# Altium PCB balancing.PcbDoc
Units mm, origin at the board's own origin, x right, y up, seen from the top; angles counter-clockwise.
Board outline 80 x 60 mm, 2 copper layers (Top Layer, Bottom Layer), stack 0.325 mm thick; 74 components, 72 nets, 341 pads, 96 vias.
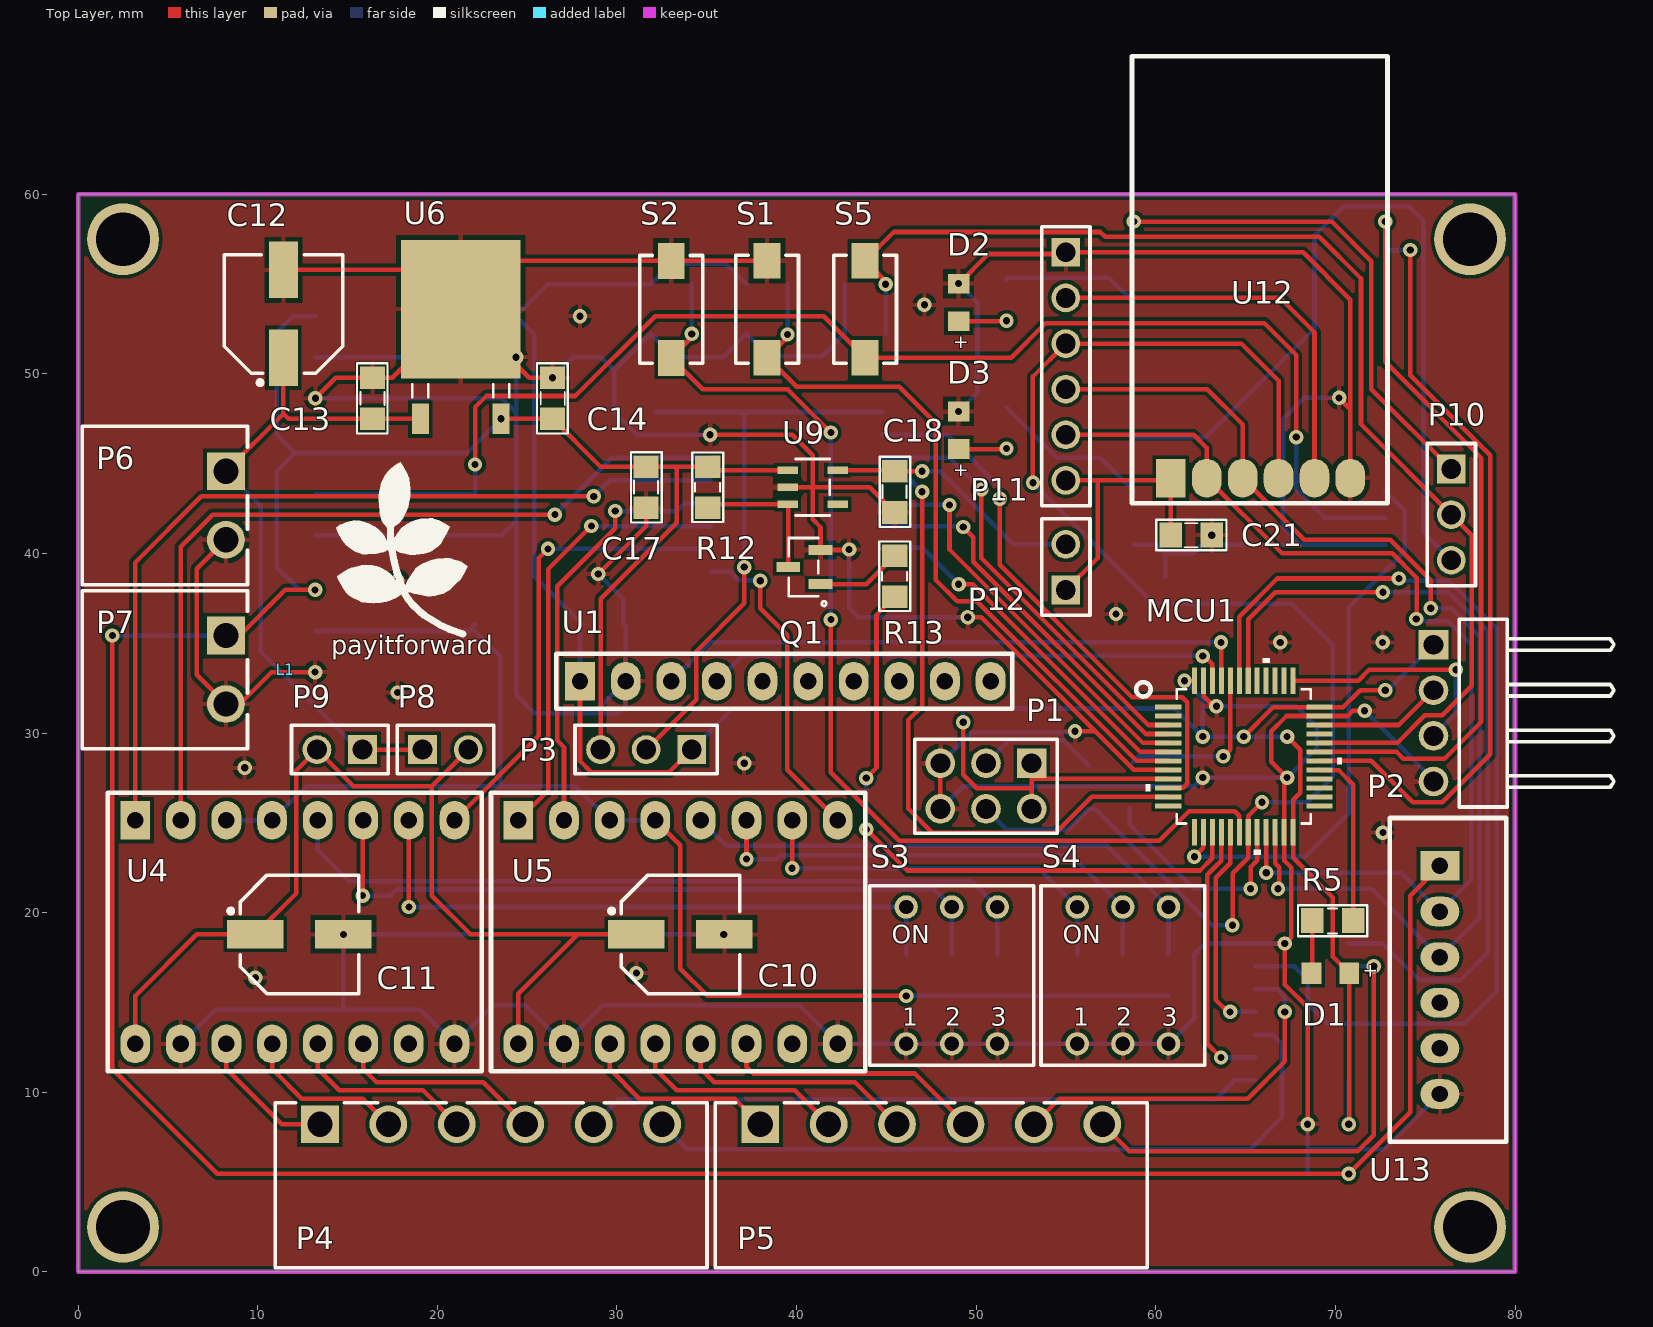
[diagram p0: Top Layer view]
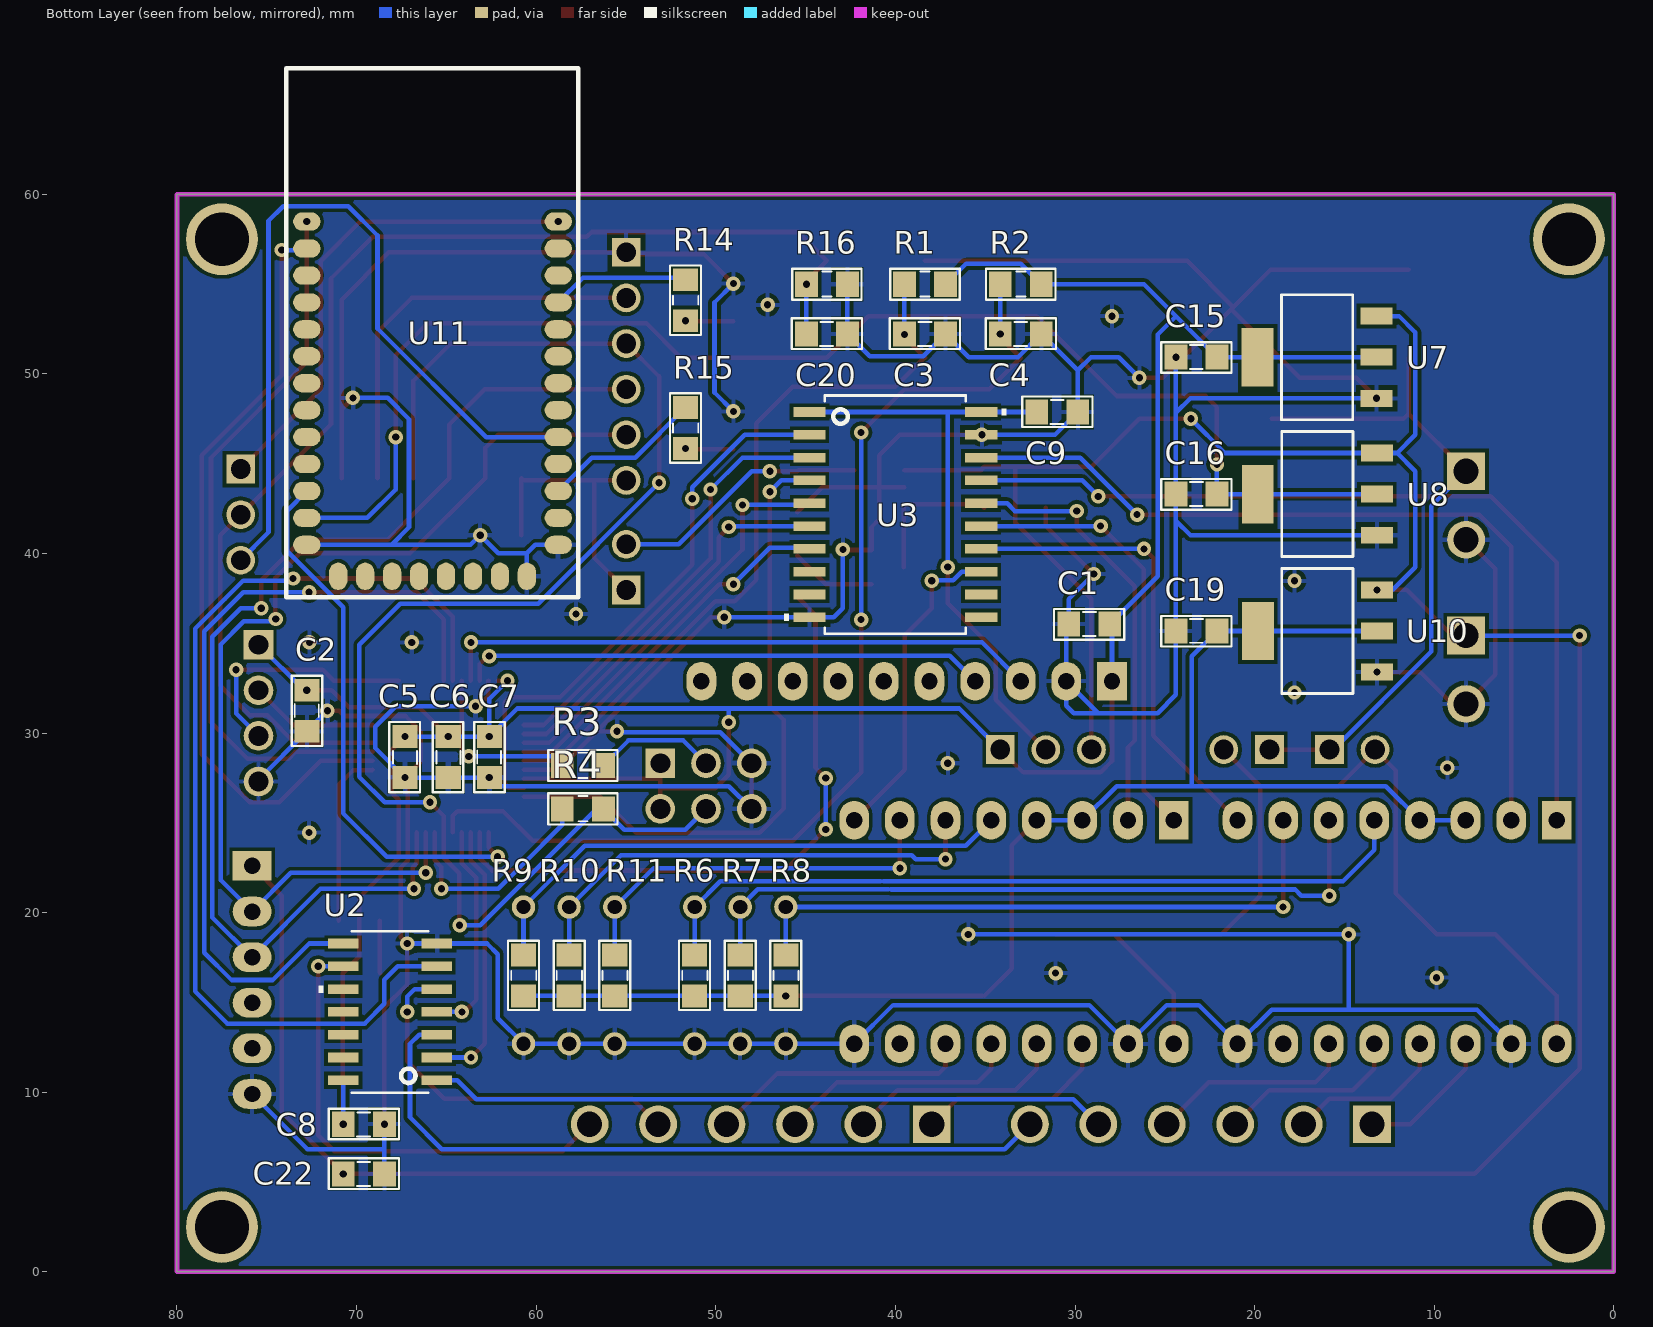
[diagram p1: Bottom Layer view, seen from below]
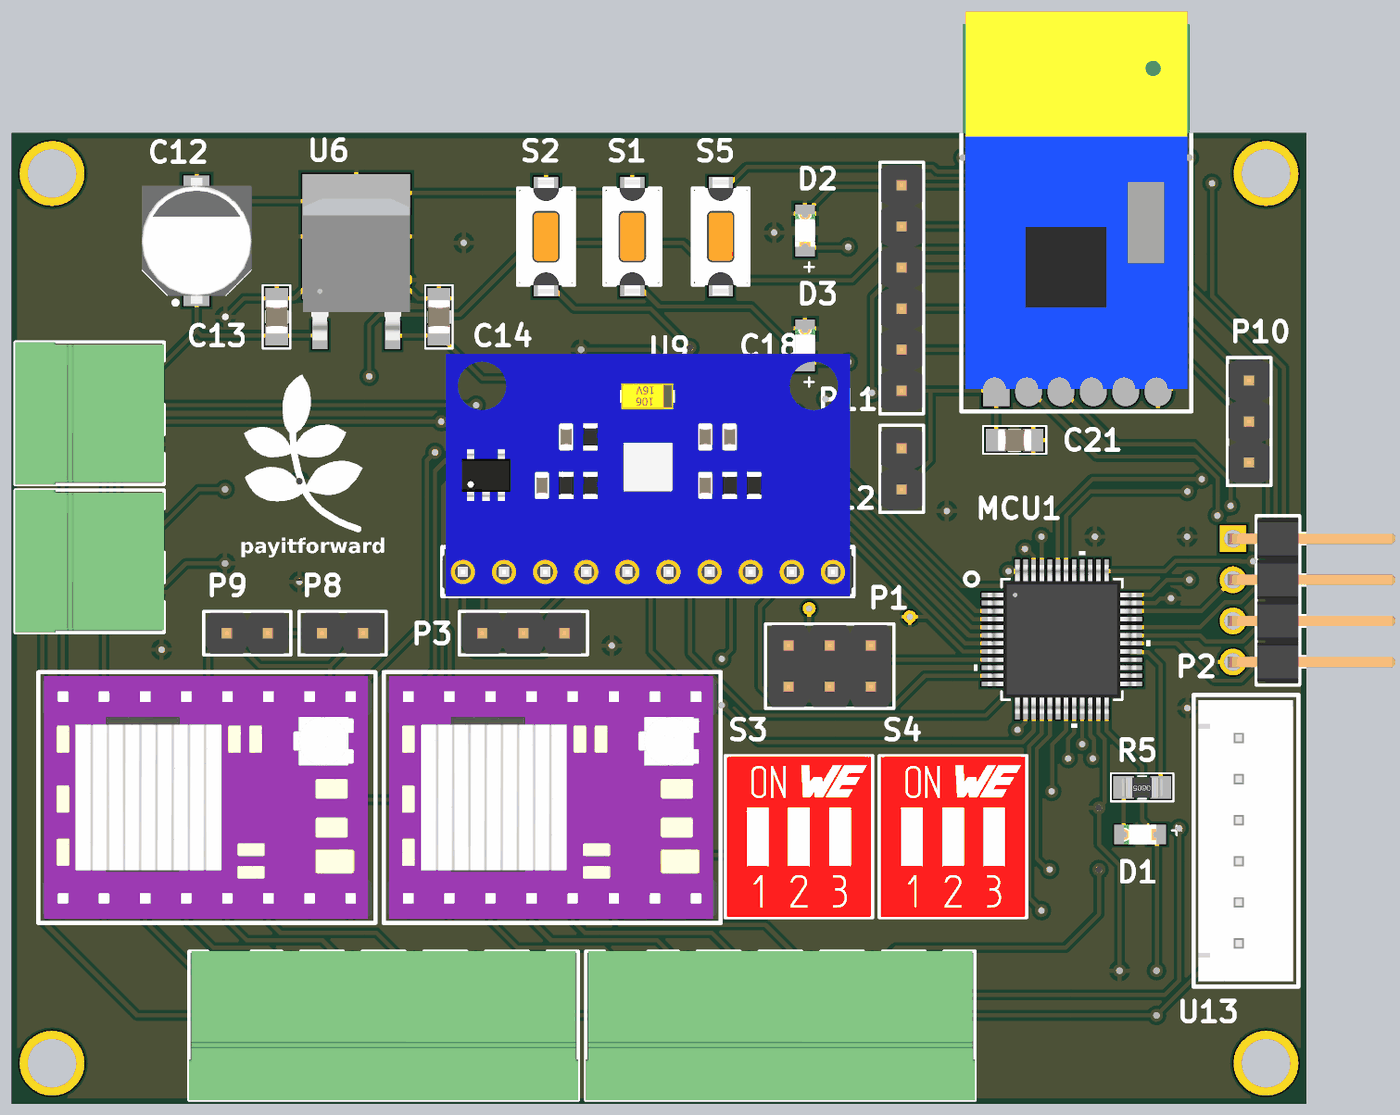
[diagram p2: 3D render of the assembled board from above, using the file's embedded part models]
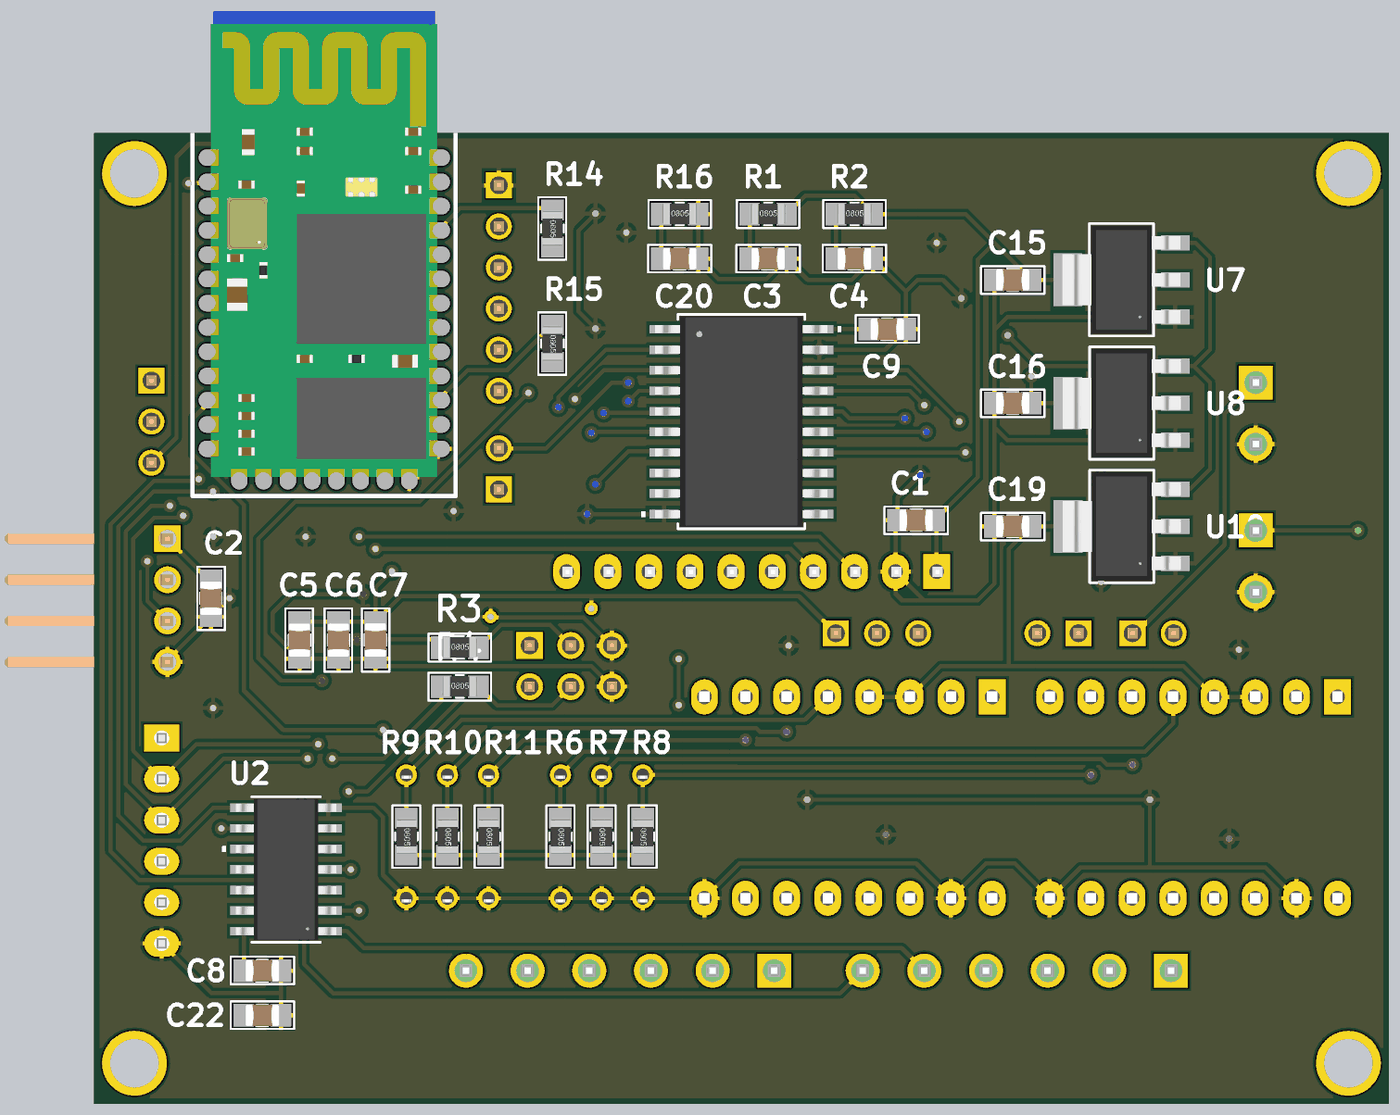
[diagram p3: 3D render of the assembled board from below, using the file's embedded part models]

## Layer stack, top to bottom
Top Solder: solder mask 0.0102, Solder Resist, Dk 3.5
Top Layer: signal copper 0.0356
Dielectric 1: dielectric 0.254, FR-4, Dk 4.2
Bottom Layer: signal copper 0.0356
Bottom Solder: solder mask 0.0102, Solder Resist, Dk 3.5

## Board outline
0,0 0,60 80,60 80,0

## Design rules (kind name [scope] priority, off if disabled: settings)
Clearance [All] p1: gap=0.203 ignorepadtopadclearanceinfootprint=FALSE
Height [All] p1: minheight=0 maxheight=127 prefheight=12.7
PlaneConnect [All] p1: planeconnectstyle=Direct reliefexpansion=0.508 reliefentries=4 reliefconductorwidth=0.254 reliefairgap=0.254
PolygonConnect [All] p1: connectstyle=Relief reliefconductorwidth=0.254 reliefentries=4 polygonreliefangle="90 Angle" airgapwidth=0.254
RoutingVias [All] p1: holewidth=0.4 width=0.8 viastyle="Through Hole" minholewidth=0.4 minwidth=0.8 maxholewidth=0.4 maxwidth=0.8
SolderMaskExpansion [All] p1: expansion=0.102
Width [All] p1: maxlimit=0.381 minlimit=0.152 preferedwidth=0.254
28 further rules are at their usual default settings.

## Classes and differential pairs
component class power_supply: C12 C13 C14 C15 C16 C17 C18 C19 P6 P7 P8 P9 Q1 R12 R13 U6 U7 U8 U9 U10
component class motor_controller: C8 C9 C10 C11 P4 P5 P? R6 R7 R8 R9 R10 R11 S3 S4 U2 U3 U4 U5 U?
component class mcu: C1 C2 C3 C4 C5 C6 C7 D1 L1 MCU1 P1 P2 R1 R2 R3 R4 R5 S1 S2 U1
component class communication: C20 C21 C22 C? D2 D3 P10 P11 P12 R14 R15 R16 S5 U11 U12 U?

## Components (designator, comment, footprint, x,y, rotation, side; value= is the part's Value field where it differs from the comment)
C1 "Cap-100nF-50V-0805" CAP-SM-0805 30.353,36.068 r180 bottom value=100nF/50V
C2 "Cap-100nF-50V-0805" CAP-SM-0805 72.771,30.099 r90 bottom value=100nF/50V
C3 "Cap-100nF-50V-0805" CAP-SM-0805 37.211,52.228 r0 bottom value=100nF/50V
C4 "Cap-100nF-50V-0805" CAP-SM-0805 31.877,52.228 r0 bottom value=100nF/50V
C5 "Cap-100nF-50V-0805" CAP-SM-0805 67.31,29.807 r270 bottom value=100nF/50V
C6 "Cap-100nF-50V-0805" CAP-SM-0805 64.897,29.807 r270 bottom value=100nF/50V
C7 "Cap-100nF-50V-0805" CAP-SM-0805 62.611,27.521 r90 bottom value=100nF/50V
C8 "Cap-100nF-50V-0805" CAP-SM-0805 68.453,8.225 r0 bottom value=100nF/50V
C9 "Cap-100nF-50V-0805" CAP-SM-0805 29.845,47.879 r0 bottom value=100nF/50V
C10 "Cap-Al-100uF-16V-D6L5" CAP-SM-AL-SIZE-D-D6L6 33.528,18.796 r0 top value=100uF/16V
C11 "Cap-Al-100uF-16V-D6L5" CAP-SM-AL-SIZE-D-D6L6 12.319,18.796 r0 top value=100uF/16V
C12 "Cap-Al-100uF-16V-D6L5" CAP-SM-AL-SIZE-D-D6L6 11.43,53.34 r90 top value=100uF/16V
C13 "Cap-10uF-50V-0805" CAP-SM-0805 16.383,49.784 r270 top value=10uF/50V
C14 "Cap-10uF-50V-0805" CAP-SM-0805 26.416,49.784 r270 top value=10uF/50V
C15 "Cap-10uF-50V-0805" CAP-SM-0805 24.384,50.931 r180 bottom value=10uF/50V
C16 "Cap-10uF-50V-0805" CAP-SM-0805 24.384,43.307 r180 bottom value=10uF/50V
C17 "Cap-100nF-50V-0805" CAP-SM-0805 31.623,42.545 r90 top value=100nF/50V
C18 "Cap-10uF-50V-0805" CAP-SM-0805 45.466,42.291 r90 top value=10uF/50V
C19 "Cap-10uF-50V-0805" CAP-SM-0805 24.384,35.687 r180 bottom value=10uF/50V
C20 "Cap-100nF-50V-0805" CAP-SM-0805 42.672,52.228 r0 bottom value=100nF/50V
C21 "Cap-100nF-50V-0805" CAP-SM-0805 63.119,41.021 r180 top value=100nF/50V
C22 "Cap-100nF-50V-0805" CAP-SM-0805 68.453,5.461 r0 bottom value=100nF/50V
D1 "Red, 2V" WL-SMCW_0805 69.723,16.637 r0 top
D2 "Amber, 2V" WL-SMCW_0805 49.022,53.975 r270 top
D3 "Yellow, 2V" WL-SMCW_0805 49.022,46.863 r270 top
L1 "LogoPIF" "PIF LOGO TOP OVERLAY" 11.557,33.528 r0 top
MCU1 "STM32F103C8T6" STM32F103C8T6 64.897,28.702 r0 top
P1 "61300621121" 61300621121 50.546,27.051 r180 top
P2 "61300411021" 61300411021 78.232,31.115 r90 top
P3 "61300311121" 61300311121 31.623,29.083 r180 top
P4 "691322310006" 691322310006 22.987,4.825 r0 top
P5 "691322310006" 691322310006 47.498,4.825 r0 top
P6 "691322310002" 691322310002 4.826,42.672 r270 top
P7 "691322310002" 691322310002 4.826,33.528 r270 top
P8 "61300211121" 61300211121 20.447,29.083 r0 top
P9 "61300211121" 61300211121 14.566,29.083 r180 top
P10 "61300311121" 61300311121 76.454,42.164 r270 top
P11 "61300611121" 61300611121 54.991,50.419 r270 top
P12 "61300211121" 61300211121 54.991,39.243 r90 top
Q1 "MMBT3904-1AM" SOT23_NEX 40.386,39.243 r90 top
R1 "Res-10k-0805" RES-SM-0805 39.497,54.991 r180 bottom value=10K
R2 "Res-10k-0805" RES-SM-0805 34.163,54.991 r180 bottom value=10K
R3 "Res-100K-0805" RES-SM-0805 58.547,28.194 r180 bottom value=100K
R4 "Res-100K-0805" RES-SM-0805 58.547,25.781 r180 bottom value=100K
R5 "Res-1K-0805" RES-SM-0805 70.993,19.558 r180 top value=1K
R6 "Res-1K-0805" RES-SM-0805 51.181,17.653 r270 bottom value=1K
R7 "Res-1K-0805" RES-SM-0805 48.641,17.653 r270 bottom value=1K
R8 "Res-1K-0805" RES-SM-0805 46.101,17.653 r270 bottom value=1K
R9 "Res-1K-0805" RES-SM-0805 60.706,17.653 r270 bottom value=1K
R10 "Res-1K-0805" RES-SM-0805 58.166,17.653 r270 bottom value=1K
R11 "Res-1K-0805" RES-SM-0805 55.626,17.653 r270 bottom value=1K
R12 "Res-4.7K-0805" RES-SM-0805 35.052,42.545 r90 top value=4.7K
R13 "Res-100K-0805" RES-SM-0805 45.466,37.592 r90 top value=100K
R14 "Res-470-0805" RES-SM-0805 51.689,55.245 r270 bottom value=470
R15 "Res-470-0805" RES-SM-0805 51.689,48.133 r270 bottom value=470
R16 "Res-10k-0805" RES-SM-0805 44.958,54.991 r180 bottom value=10K
S1 "434113043826" 434113043826 38.354,53.601 r90 top
S2 "434113043826" 434113043826 33.02,53.594 r90 top
S3 "418117170903" 418117170903 48.641,16.51 r0 top
S4 "418117170903" 418117170903 58.166,16.51 r0 top
S5 "434113043826" 434113043826 43.815,53.601 r90 top
U1 "GY9250" GY9250 27.94,32.893 r270 top
U2 "74HC14D,652" 74HC14D,652 68.135,14.478 r0 bottom
U3 "74HC245D,652" 74HC245D,652 40.005,42.164 r180 bottom
U4 "DRV8825" DRV8825 3.175,25.146 r270 top
U5 "DRV8825" DRV8825 24.511,25.146 r270 top
U6 "L7805" L7805 21.3,53.607 r0 top
U7 "AMS1117" AMS1117 16.523,50.931 r90 bottom
U8 "AMS1117" AMS1117 16.51,43.307 r90 bottom
U9 "XC6204B181MR" XC6204B181MR 40.894,43.688 r0 top
U10 "AMS1117" AMS1117 16.505,35.687 r90 bottom
U11 "HC0506-SMD" HC0506-SMD 72.771,40.482 r180 bottom
U12 "LC12S" LC12S 60.834,44.196 r270 top
U13 "Holybro" HOLYBRO 75.819,22.606 r180 top

## Footprints (in the part's own frame and the unit in brackets; to place one, negate y for a bottom-side part, rotate by r counter-clockwise, add the part's x,y. Pads: shape width x height; smd on the part's side, far side on the other; paste and mask are expansions set on the pad)
74HC14D,652 [mil]
  rect 67x21 smd paste+0 mask+0: 1(-102.5,150) 2(-102.5,100) 3(-102.5,50) 4(-102.5,0) 5(-102.5,-50) 6(-102.5,-100) 7(-102.5,-150) 8(102.5,-150) 9(102.5,-100) 10(102.5,-50) 11(102.5,0) 12(102.5,50) 13(102.5,100) 14(102.5,150)
  silkscreen extent -84,-177 156,177, body extent -122,-172 122,172, height 69
74HC245D,652 [mil]
  rect 71x21 smd paste+0 mask+0: 1(-188,225) 2(-188,175) 3(-188,125) 4(-188,75) 5(-188,25) 6(-188,-25) 7(-188,-75) 8(-188,-125) 9(-188,-175) 10(-188,-225) 11(188,-225) 12(188,-175) 13(188,-125) 14(188,-75) 15(188,-25) 16(188,25) 17(188,75) 18(188,125) 19(188,175) 20(188,225)
  silkscreen extent -244,-261 244,261, body extent -209,-256 209,256, height 104
61300211121 [mm] "Pin Header, pitch 2.54 mm, THT, Vertical, single row, 2p"
  rect 1.6x1.6 hole 1.1: 1(-1.27,0)
  round 1.6 hole 1.1: 2(1.27,0)
  silkscreen extent -2.69,-1.34 2.69,1.34, body extent -2.54,-1.27 2.54,1.27, height 8.57
61300311121 [mm] "Pin Header, pitch 2.54 mm, THT, Vertical, single row, 3p"
  rect 1.6x1.6 hole 1.1: 1(-2.54,0)
  round 1.6 hole 1.1: 2(0,0) 3(2.54,0)
  silkscreen extent -3.96,-1.34 3.96,1.34, body extent -3.81,-1.27 3.81,1.27, height 8.57
61300411021 [mm] "Pin Header, pitch 2.54 mm, THT, Angled, single row, 4p"
  rect 1.65x1.65 hole 1.1: 1(3.81,2.77)
  round 1.65 hole 1.1: 2(1.27,2.77) 3(-1.27,2.77) 4(-3.81,2.77)
  silkscreen extent -5.23,-7.27 5.23,1.34, body extent -5.08,-7.27 5.08,3.09, height 2.58
61300611121 [mm] "Pin Header, pitch 2.54 mm, THT, Vertical, single row, 6p"
  rect 1.6x1.6 hole 1.1: 1(-6.35,0)
  round 1.6 hole 1.1: 2(-3.81,0) 3(-1.27,0) 4(1.27,0) 5(3.81,0) 6(6.35,0)
  silkscreen extent -7.77,-1.34 7.77,1.34, body extent -7.62,-1.27 7.62,1.27, height 8.57
61300621121 [mm] "Pin Header, pitch 2.54 mm, THT, Vertical, dual row, 6p"
  rect 1.65x1.65 hole 1.1: 1(-2.54,-1.27)
  round 1.65 hole 1.1: 2(-2.54,1.27) 3(0,-1.27) 4(0,1.27) 5(2.54,-1.27) 6(2.54,1.27)
  silkscreen extent -3.96,-2.61 3.96,2.61, body extent -3.81,-2.54 3.81,2.54, height 8.59
418117170903 [mm] "2.54 mm compact THT with flat actuator, 3p"
  round 1.3 hole 0.8: 1(-2.54,-3.81) 2(0,-3.81) 3(2.54,-3.81) 4(2.54,3.81) 5(0,3.81) 6(-2.54,3.81)
  silkscreen extent -4.56,-5 4.56,5, body extent -4.46,-4.95 4.46,4.95, height 5.75
434113043826 [mm] "SMD Tact Switch, body 6x3.5mm"
  rect 2x1.5 smd: 1(-2.7,0) 2(2.7,0)
  silkscreen extent -3,-1.75 3,1.75, body extent -3.65,-1.75 3.65,1.75, height 4.3
691322310002 [mm] "Horizontal PCB Header, pitch 3.81mm, 02p"
  rect 2.1x2.1 hole 1.4: 1(-1.905,3.4)
  round 2.1 hole 1.4: 2(1.905,3.4)
  silkscreen extent -4.4,-4.6 4.41,4.6, body extent -4.4,-4.6 4.41,4.6, height 7.25
691322310006 [mm] "Horizontal PCB Header, pitch 3.81mm, 06p"
  rect 2.1x2.1 hole 1.4: 1(-9.525,3.4)
  round 2.1 hole 1.4: 2(-5.715,3.4) 3(-1.905,3.4) 4(1.905,3.4) 5(5.715,3.4) 6(9.525,3.4)
  silkscreen extent -12.02,-4.6 12.03,4.6, body extent -12.02,-4.6 12.02,4.6, height 7.25
AMS1117 [mil]
  rect 37x70 smd paste+0 mask+0: 1(-90.16,-130.5) 2(0,-130.5) 3(90.16,-130.5)
  rect 128x70 smd paste+0 mask+0: 4(0,130.5)
  silkscreen extent -137,-78 137,78, body extent -132,-144 132,144, height 71
CAP-SM-0805 [mil]
  rect 50x55 smd: 1(0,0) 2(90,0)
  silkscreen extent -32,-34 122,33, body extent 4,-27 86,27, height 30
CAP-SM-AL-SIZE-D-D6L6 [mm] "WH6.6"
  rect 3.15x1.6 smd: 1(-2.45,0) 2(2.45,0)
  silkscreen extent -3.95,-3.3 3.3,3.3, body extent -3.9,-3.4 3.9,3.4, height 5.7
DRV8825 [mil]
  rect 85x65 hole 36: 1(0,0)
  oval 85x65 hole 36: 2(0,100) 3(0,200) 4(0,300) 5(0,400) 6(0,500) 7(0,600) 8(0,700) 9(490,0) 10(490,100) 11(490,200) 12(490,300) 13(490,400) 14(490,500) 15(490,600) 16(490,700)
  silkscreen extent -60,-60 550,760, body extent -51,-50 540,750, height 494
GY9250 [mil]
  rect 85x65 hole 36: 1(0,0)
  oval 85x65 hole 36: 2(0,100) 3(0,200) 4(0,300) 5(0,400) 6(0,500) 7(0,600) 8(0,700) 9(0,800) 10(0,900)
  silkscreen extent -60,-52 60,948, body extent -531,-52 60,948, height 367
HC0506-SMD [mil]
  oval 60x40 smd: 1(0,708.66) 2(0,649.61) 3(0,590.55) 4(0,531.5) 5(0,472.44) 6(0,413.39) 7(0,354.33) 8(0,295.28) 9(0,236.22) 10(0,177.16) 11(0,118.11) 12(0,59.05) 13(0,0) 22(551.18,0) 23(551.18,59.05) 24(551.18,118.11) 25(551.18,177.16) 26(551.18,236.22) 27(551.18,295.28) 28(551.18,354.33) 29(551.18,413.39) 30(551.18,472.44) 31(551.18,531.5) 32(551.18,590.55) 33(551.18,649.61) 34(551.18,708.66)
  oval 40x60 smd: 14(68.9,-68.9) 15(127.95,-68.9) 16(187.01,-68.9) 17(246.06,-68.9) 18(305.12,-68.9) 19(364.17,-68.9) 20(423.23,-68.9) 21(482.28,-68.9)
  silkscreen extent -45,-115 595,1045, body extent -1,-69 551,1034, height 93
HOLYBRO [mil]
  rect 85x65 hole 36: 1(0,0)
  oval 85x65 hole 36: 2(0,100) 3(0,200) 4(0,300) 5(0,400) 6(0,500)
  silkscreen extent -145,-105 110,605, body extent -132,-92 98,592, height 284
L7805 [mil]
  rect 37x67 smd: 1(-88.58,-240.5) 2(88.58,-240.5)
  rect 262x304 smd: 3(0,0)
  silkscreen extent -106,-193 106,-165, body extent -130,-253 130,93, height 95
LC12S [mil]
  rect 85x65 smd: 1(0,0)
  oval 85x65 smd: 2(0,78.74) 3(0,157.48) 4(0,236.22) 5(0,314.96) 6(0,393.7)
  Top Layer pour cut-out: 30,350
  silkscreen extent -925,-85 55,480, body extent -917,-75 0,464, height 79
"PIF LOGO TOP OVERLAY" [mm]
  silkscreen extent 2.8,2 10.14,11.54
RES-SM-0805 [mil]
  rect 50x55 smd: 1(0,0) 2(90,0)
  silkscreen extent -31,-34 121,34, body extent -5,-24 95,25, height 20
SOT23_NEX [mil]
  rect 22x52 smd paste+0 mask+4: 1(-37.5,-37.21) 2(37.5,-37.21) 3(0,33.36)
  silkscreen extent -85,-50 64,33, body extent -59,-54 59,44, height 43
STM32F103C8T6 [mil]
  rect 58x11 smd: 1(-166,108.27) 2(-166,88.58) 3(-166,68.9) 4(-166,49.21) 5(-166,29.53) 6(-166,9.84) 7(-166,-9.84) 8(-166,-29.53) 9(-166,-49.21) 10(-166,-68.9) 11(-166,-88.58) 12(-166,-108.27) 25(166,-108.27) 26(166,-88.58) 27(166,-68.9) 28(166,-49.21) 29(166,-29.53) 30(166,-9.84) 31(166,9.84) 32(166,29.53) 33(166,49.21) 34(166,68.9) 35(166,88.58) 36(166,108.27)
  rect 11x58 smd: 13(-108.27,-166) 14(-88.58,-166) 15(-68.9,-166) 16(-49.21,-166) 17(-29.53,-166) 18(-9.84,-166) 19(9.84,-166) 20(29.53,-166) 21(49.21,-166) 22(68.9,-166) 23(88.58,-166) 24(108.27,-166) 37(108.27,166) 38(88.58,166) 39(68.9,166) 40(49.21,166) 41(29.53,166) 42(9.84,166) 43(-9.84,166) 44(-29.53,166) 45(-49.21,166) 46(-68.9,166) 47(-88.58,166) 48(-108.27,166)
  silkscreen extent -236,-215 215,215, body extent -181,-181 181,181, height 63
WL-SMCW_0805 [mm] "SMD Mono-color Chip LED, body 2.0x1.25mm"
  rect 1.1x1.2 smd: 1(-1.05,0) 2(1.05,0)
  body extent -1,-0.63 1,0.62, height 0.7
XC6204B181MR [mil]
  rect 44.5x17 smd paste+0 mask+0: 1(-54.75,37.4) 2(-54.75,0) 3(-54.75,-37.4) 4(54.75,-37.4) 5(54.75,37.4)
  silkscreen extent -38,-62 38,62, body extent -55,-57 55,57, height 51

## Part data
C1 C2 C3 C4 C5 C6 C7 C8 C9 C17 C20 C21 C22: "CAP CER 0.1UF 50V Y5V 0805", Manufacturer="Samsung Electro-Mechanics", Manufacturer Part Number=CL21F104ZBCNNNC, Supplier 1 Part Number=1276-1007-1-ND, Local Supplier=thegioiic, Local Supplier Link=https://thegioiic.com/products/tu-100nf-0-1uf-50v-0805, Supplier 1=Digikey, Supplier 1 Link=https://www.digikey.com/product-detail/en/samsung-electro-mechanics/CL21F104ZBCNNNC/1276-1007-1-ND/3889093
C10 C11 C12: "CAP ALUM 100UF 20% 16V SMD", Manufacturer=Nichicon, Manufacturer Part Number=UWX1C101MCL1GB, Supplier 1 Part Number=493-2105-1-ND, Local Supplier=thegioiic, Local Supplier Link=https://thegioiic.com/products/tu-nhom-smd-100uf-16v-d6-3l5-4, Supplier 1=Digikey, Supplier 1 Link=https://www.digikey.com/product-detail/en/nichicon/UWX1C101MCL1GB/493-2105-1-ND/590080
C13 C14 C15 C16 C18 C19: "CAP CER 10UF 50V X5R 0805", Manufacturer=Yageo, Manufacturer Part Number=CC0805KKX5R9BB106, Supplier 1 Part Number=311-3499-2-ND, Local Supplier=thegioiic, Local Supplier Link=https://thegioiic.com/products/tu-10uf-50v-0805, Supplier 1=Digikey, Supplier 1 Link=https://www.digikey.com/product-detail/en/yageo/CC0805KKX5R9BB106/311-3499-2-ND/7164383
D1: library part 150080RS75000, "WL-SMCW SMT Mono-color Chip LED Waterclear, size 0805, Red, 2V, 140deg", Emitting Color=Red, Forward Voltage typ.=2V, Operating Temperature="-40 to +85degC", Chip Technology=AlInGaP, ComponentLink1Description=Manufacturer, ComponentLink1URL=http://www.we-online.de, ComponentLink2Description=Datasheet, ComponentLink2URL=https://www.we-online.com/catalog/datasheet/150080RS75000.pdf, Dominant Wavelength typ.=625nm, Luminous Intensity typ.=150mcd, Mounting Technology=SMT, Packaging="Tape and Reel", Part Number=150080RS75000, Peak Wavelength typ.=630nm, Published Date="December 2019", Publisher="Wurth Elektronik", Size=0805, Viewing Angle=140deg
D2: library part 150080AS75000, "WL-SMCW SMT Mono-color Chip LED Waterclear, size 0805, Amber, 2V, 140deg", Emitting Color=Amber, Forward Voltage typ.=2V, Operating Temperature="-40 to +85degC", Chip Technology=AlInGaP, ComponentLink1Description=Manufacturer, ComponentLink1URL=http://www.we-online.de, ComponentLink2Description=Datasheet, ComponentLink2URL=https://www.we-online.com/catalog/datasheet/150080AS75000.pdf, Dominant Wavelength typ.=605nm, Luminous Intensity typ.=130mcd, Mounting Technology=SMT, Packaging="Tape and Reel", Part Number=150080AS75000, Peak Wavelength typ.=610nm, Published Date="December 2019", Publisher="Wurth Elektronik", Size=0805, Viewing Angle=140deg
D3: library part 150080YS75000, "WL-SMCW SMT Mono-color Chip LED Waterclear, size 0805, Yellow, 2V, 140deg", Emitting Color=Yellow, Forward Voltage typ.=2V, Operating Temperature="-40 to +85degC", Chip Technology=AlInGaP, ComponentLink1Description=Manufacturer, ComponentLink1URL=http://www.we-online.de, ComponentLink2Description=Datasheet, ComponentLink2URL=https://www.we-online.com/catalog/datasheet/150080YS75000.pdf, Dominant Wavelength typ.=590nm, Luminous Intensity typ.=120mcd, Mounting Technology=SMT, Packaging="Tape and Reel", Part Number=150080YS75000, Peak Wavelength typ.=595nm, Published Date="December 2019", Publisher="Wurth Elektronik", Size=0805, Viewing Angle=140deg
P1: "WR-PHD Pin Header, THT, pitch 2.54mm, Dual Row, Vertical, 6p", Contact Resistance=20mOhm, Manufacturer="Wurth Elektronik", Operating Temperature="-40 to +105degC", Rated Current=3A, Withstanding Voltage=500VAC, Working Voltage=250VAC, ComponentLink1Description=Manufacturer, ComponentLink1URL=http://www.we-online.de, ComponentLink2Description=Datasheet, ComponentLink2URL=https://www.we-online.com/catalog/datasheet/61300621121.pdf, Gender="Pin Header", Manufacturer Part Number=61300621121, Mounting Technology=THT, Orientation=Vertical, Packaging=Bag, Pin Number=6, Pitch=2.54mm, Published Date="May 2020", Row Number=Dual
P2: "WR-PHD Pin Header, THT, pitch 2.54mm, Single Row, Angled, 4p", Contact Resistance=20mOhm, Manufacturer="Wurth Elektronik", Operating Temperature="-40 to +105degC", Rated Current=3A, Withstanding Voltage=500VAC, Working Voltage=250VAC, ComponentLink1Description=Manufacturer, ComponentLink1URL=http://www.we-online.de, ComponentLink2Description=Datasheet, ComponentLink2URL=https://www.we-online.com/catalog/datasheet/61300411021.pdf, Gender="Pin Header", Manufacturer Part Number=61300411021, Mounting Technology=THT, Orientation=Angled, Packaging=Bag, Pin Number=4, Pitch=2.54mm, Published Date="May 2020", Row Number=Single
P3 P10: "WR-PHD Pin Header, THT, pitch 2.54mm, Single Row, Vertical, 3p", Contact Resistance=20mOhm, Manufacturer="Wurth Elektronik", Operating Temperature="-40 to +105degC", Rated Current=3A, Withstanding Voltage=500VAC, Working Voltage=250VAC, ComponentLink1Description=Manufacturer, ComponentLink1URL=http://www.we-online.de, ComponentLink2Description=Datasheet, ComponentLink2URL=https://www.we-online.com/catalog/datasheet/61300311121.pdf, Gender="Pin Header", Manufacturer Part Number=61300311121, Mounting Technology=THT, Orientation=Vertical, Packaging=Bag, Pin Number=3, Pitch=2.54mm, Published Date="May 2020", Row Number=Single
P4 P5: "WR-TBL Serie 322 Horizontal PCB Header, Pluggable, pitch 3.81mm, 6p", Operating Temperature="-40 to +105degC", Rated Current [UL]=10A, Working Voltage [UL]=300VAC, Application=Pluggable, Compliance=RoHS, ComponentLink1Description=Manufacturer, ComponentLink1URL=http://www.we-online.de, ComponentLink2Description=Datasheet, ComponentLink2URL=https://katalog.we-online.de/em/datasheet/691322310006.pdf, Modularity=No, Mounting Technology=THT, Packaging=Box, Part Number=691322310006, PCB/Cable/Panel=PCB, Pin Number=6, Pitch=3.81mm, Published Date="October 2019", Publisher="Wurth Elektronik", Type=Horizontal
P6 P7: "WR-TBL Serie 322 Horizontal PCB Header, Pluggable, pitch 3.81mm, 2p", Operating Temperature="-40 to +105degC", Rated Current [UL]=10A, Working Voltage [UL]=300VAC, Application=Pluggable, Compliance=RoHS, ComponentLink1Description=Manufacturer, ComponentLink1URL=http://www.we-online.de, ComponentLink2Description=Datasheet, ComponentLink2URL=https://katalog.we-online.de/em/datasheet/691322310002.pdf, Modularity=No, Mounting Technology=THT, Packaging=Box, Part Number=691322310002, PCB/Cable/Panel=PCB, Pin Number=2, Pitch=3.81mm, Published Date="October 2019", Publisher="Wurth Elektronik", Type=Horizontal
P8 P9 P12: "WR-PHD Pin Header, THT, pitch 2.54mm, Single Row, Vertical, 2p", Contact Resistance=20mOhm, Manufacturer="Wurth Elektronik", Operating Temperature="-40 to +105degC", Rated Current=3A, Withstanding Voltage=500VAC, Working Voltage=250VAC, ComponentLink1Description=Manufacturer, ComponentLink1URL=http://www.we-online.de, ComponentLink2Description=Datasheet, ComponentLink2URL=https://www.we-online.com/catalog/datasheet/61300211121.pdf, Gender="Pin Header", Manufacturer Part Number=61300211121, Mounting Technology=THT, Orientation=Vertical, Packaging=Bag, Pin Number=2, Pitch=2.54mm, Published Date="May 2020", Row Number=Single
P11: "WR-PHD Pin Header, THT, pitch 2.54mm, Single Row, Vertical, 6p", Contact Resistance=20mOhm, Manufacturer="Wurth Elektronik", Operating Temperature="-40 to +105degC", Rated Current=3A, Withstanding Voltage=500VAC, Working Voltage=250VAC, ComponentLink1Description=Manufacturer, ComponentLink1URL=http://www.we-online.de, ComponentLink2Description=Datasheet, ComponentLink2URL=https://www.we-online.com/catalog/datasheet/61300611121.pdf, Gender="Pin Header", Manufacturer Part Number=61300611121, Mounting Technology=THT, Orientation=Vertical, Packaging=Bag, Pin Number=6, Pitch=2.54mm, Published Date="May 2020", Row Number=Single
R1 R2 R16: "RES 10K OHM 1% 1/4W 0805", Manufacturer="Stackpole Electronics Inc", Manufacturer Part Number=RNCP0805FTD10K0, Supplier 1 Part Number=RNCP0805FTD10K0CT-ND, Local Supplier=thegioiic, Local Supplier Link=https://thegioiic.com/products/dien-tro-10k-ohm-0805-5, Supplier 1=Digikey, Supplier 1 Link=https://www.digikey.com/product-detail/en/stackpole-electronics-inc/RNCP0805FTD10K0/RNCP0805FTD10K0CT-ND/2240601
R3 R4 R13: "RES 0 OHM JUMPER 0805", Manufacturer="Vishay Dale", Manufacturer Part Number=WSL080500000ZEA9, Supplier 1 Part Number=541-3928-1-ND, Local Supplier=thegioiic, Local Supplier Link=https://thegioiic.com/products/dien-tro-0-ohm-0805-5, Supplier 1=Digikey, Supplier 1 Link=https://www.digikey.com/product-detail/en/vishay-dale/WSL080500000ZEA9/541-3928-1-ND/7423223
R5 R6 R7 R8 R9 R10 R11: "RES 1K OHM 1% 1/4W 0805", Manufacturer="Stackpole Electronics Inc", Manufacturer Part Number=RNCP0805FTD1K00, Supplier 1 Part Number=RNCP0805FTD1K00CT-ND, Local Supplier=thegioiic, Local Supplier Link=https://thegioiic.com/products/dien-tro-1k-ohm-0805-5, Supplier 1=Digikey, Supplier 1 Link=https://www.digikey.com/product-detail/en/stackpole-electronics-inc/RNCP0805FTD1K00/RNCP0805FTD1K00CT-ND/2240568
R12: "RES SMD 4.7K OHM 5% 1/8W 0805", Manufacturer=Yageo, Manufacturer Part Number=RC0805JR-074K7L, Supplier 1 Part Number=311-4.7KARCT-ND, Local Supplier=thegioiic, Local Supplier Link=https://thegioiic.com/products/dien-tro-4-7k-ohm-0805-5, Supplier 1=Digikey, Supplier 1 Link=https://www.digikey.com/product-detail/en/yageo/RC0805JR-074K7L/311-4.7KARCT-ND/731274
R14 R15: "RES 470 OHM JUMPER 0805", Manufacturer=YAG6006CT-ND, Manufacturer Part Number=PE0805FRF7W0R047L, Local Supplier=thegioiic, Local Supplier Link=https://www.thegioiic.com/products/dien-tro-470-kohm-0805-5, Supplier 1=Digikey, Supplier 1 Link=https://www.digikey.com/product-detail/en/yageo/PE0805FRF7W0R047L/YAG6006CT-ND/9696460, Supplier 1 Part Number=YAG6006CT-ND
S1 S2 S5: "WS-TASV J-Bend SMT Tact Switch 6x3.5mm, height 4.3mm, 260gf", Operating Temperature="-40 to +85degC", Rated Current=50mA, Rated Voltage=12VDC, ComponentLink1Description=Manufacturer, ComponentLink1URL=http://www.we-online.de, ComponentLink2Description=Datasheet, ComponentLink2URL=https://katalog.we-online.com/em/datasheet/434113043826.pdf, Contact Material="Stainless Steel", Contact Plating=Silver, Height=4.3mm, Mounting Technology=SMT, Operation Force=260gf, Packaging="Tape and Reel", Part Number=434113043826, Published Date="September 2019", Publisher="Wurth Elektronik", Terminal Material="Copper Alloy", Terminal Plating=Silver, Washable=No
S3 S4: "WS-DITV Compact THT Dip Switch, Flat Actuator, pitch 2.54mm, 3p", Operating Temperature="-40 to +85degC", Rated Current Non-Switching=100mA, Rated Current Switching=25mA, Rated Voltage Non-Switching=50VDC, Rated Voltage Switching=24VDC, Actuator Type="Flat Type", Circuit=SPST-NO, ComponentLink1Description=Manufacturer, ComponentLink1URL=http://www.we-online.de, ComponentLink2Description=Datasheet, ComponentLink2URL=https://katalog.we-online.com/em/datasheet/418117170903.pdf, Contact Material="Copper Alloy", Contact Plating=Gold, Mounting Technology=THT, Operation Force=800g, Packaging=Tube, Part Number=418117170903, Pitch=2.54mm, Pole Number=3, Published Date="September 2019", Publisher="Wurth Elektronik"
U6: Manufacturer_Part_Number=L7805CDT-TR, Built_By=EMA_UL_Team, Copyright="Copyright (C) 2018 Accelerated Designs. All rights reserved", RefDes=RefDes, Type=DEV, Vendor=STMicroelectronics
U11: Local Supplier Part Name=HS000881, Local Supplier=HShop, Local Supplier Link=https://hshop.vn/products/mach-thu-phat-bluetooth-hc-05-chua-ra-chon-master
U12: Local Supplier Part Number=HS000895, Local Supplier=HShop, Local Supplier Link=https://hshop.vn/products/mach-thu-phat-rf-uart-lc12s-2-4ghz
L1: Local Supplier=x, Local Supplier Link=x
MCU1: Built_By=EMA_UL_Team, Copyright="Copyright (C) 2018 Accelerated Designs. All rights reserved", Manufacturer_Part_Number=STM32F103C8T6, RefDes=RefDes, Type=DEV, Vendor=STMicroelectronics
U1: Local Supplier=HShop
U2: Copyright="Copyright (C) 2016 Accelerated Designs. All rights reserved", Manufacturer_Part_Number=74HC14D,652, RefDes=RefDes, SourceLibrary=Nexperia_2018-05-2018, Type=DEV, Vendor=Nexperia
U3: Copyright="Copyright (C) 2016 Accelerated Designs. All rights reserved", Manufacturer_Part_Number=74HC245D,652, RefDes=RefDes, SourceLibrary=Nexperia_2018-05-2018, Type=DEV, Vendor=Nexperia
U7 U8 U10: Built_By=EMA_Matt, Copyright="Copyright (C) 2018 Accelerated Designs. All rights reserved", Manufacturer_Part_Number=AMS1117, RefDes=RefDes, SourceLibrary=AMS_2019-10-31, Type=DEV, Vendor=AMS
U9: Built_By=EMA_UL_Team, Copyright="Copyright (C) 2018 Accelerated Designs. All rights reserved", Manufacturer_Part_Number=XC6204B181MR, RefDes=RefDes, SourceLibrary=Torex_2016-07-05_1, Type=DEV, Vendor="Torex Semiconductor"

## Free pads (board coordinates)
  round 4 hole 3: 2(2.5,2.5) 2(2.5,57.5) 2(77.5,2.5) 2(77.5,57.5)

## Via types
v1: diameter 0.8, hole 0.4, Top Layer to Bottom Layer, tented both sides, 94 vias
v2: diameter 0.8, hole 0.4, Top Layer to Bottom Layer, 2 vias

## Nets (pads, with @x,y where several pads share a name; then routed paths per layer and width w, separated by ;. In a path a pad name is that pad's centre, name@x,y a point inside that pad or via, vN(x,y) a via of type N, cw(c..) or ccw(c..) an arc to the next point about the centre after c; other vN are vias at no path point)
3V3_BLUE: C16.2 S5.1 U8.2 U8.4 U11.12 | length 77.1
  Top Layer w0.254: v1(22.098,44.958) 22.098,48.133 22.733,48.768 27.686,48.768 32.131,53.213 41.503,53.213 S5.1 51.951,50.901 53.882,52.832 66.04,52.832 67.818,51.054 v1(67.818,46.482)
  Bottom Layer w0.254: U8.2 U8.4 C16.2 v1(22.098,44.958) ; v1(67.818,46.482) 67.818,43.561 69.397,41.982 U11.12
3V3_DRV: C19.2 R6.2 R7.2 R8.2 R9.2 R10.2 R11.2 U4.3 U4.4 U5.3 U5.4 U10.2 U10.4 | length 80.3
  Top Layer w0.254: U5.4 33.528,23.749 33.528,16.891 35.052,15.367 ; 35.179,15.367 v1(46.101,15.367)
  Bottom Layer w0.254: U4.3 U4.4 12.7,27.051 23.495,27.051 ; U10.2@13.195,35.687 21.826,35.687 C19.2@22.098,36.068 ; C19.2 23.495,34.29 23.495,27.051 ; U5.4 U5.3 27.686,27.051 23.495,27.051 ; v1(46.101,15.367) R7.2 R6.2 R11.2 R10.2 R9.2
3V3_MCU: C1.2 C2.2 C5.1 C6.1 C7.2 C8.2 C15.2 D1.2 MCU1.9 MCU1.24 MCU1.36 MCU1.48 P1.1 P1.2 P2.1 P3.1 R1.2 R2.2 U1.1 U2.14 U7.2 U7.4 | length 155.3
  Top Layer w0.254: U1.1 27.94,28.448 28.575,27.813 32.893,27.813 P3.1 ; v2(49.276,30.607) 49.276,27.686 50.026,26.936 53.074,26.936 53.086,26.924 ; P1.2 53.086,26.924 ; P1.1 53.086,27.432 ; MCU1.9 53.106,27.452 53.086,27.432 ; v1(61.595,32.918) MCU1.48 ; v1(64.897,29.807) 66.542,31.452 MCU1.36 70.441,31.452 71.374,32.385 v1(72.771,32.385) ; v1(67.31,29.807) 68.047,29.07 68.047,26.689 67.647,26.289 MCU1.24 67.647,23.051 69.85,20.848 69.85,17.56 D1.2 70.773,8.259 v1(70.739,8.225) ; 53.086,26.924 53.086,27.432
  Bottom Layer w0.254: U7.2 U7.4 C15.2 24.38,53.213 ; U1.1 27.94,35.941 C1.2 25.4,38.735 25.4,52.193 24.38,53.213 ; P3.1 36.449,31.369 49.276,31.369 ; R1.2 36.068,56.134 33.02,56.134 R2.2 26.158,54.991 24.38,53.213 ; v2(49.276,30.607) 49.276,31.369 ; v1(61.595,32.918) 62.611,31.902 v1(62.611,29.807) ; v1(67.31,29.807) v1(64.897,29.807) v1(62.611,29.807) ; v1(70.739,8.225) U2.14 ; v1(72.771,32.385) 72.922,32.385 P2.1 ; 49.276,31.369 61.049,31.369 v1(62.611,29.807)
3V3_RF: C18.2 P12.2 U9.5 | length 14.4
  Top Layer w0.254: U9.5 45.405,44.638 C18.2 v1(46.99,44.577)
  Bottom Layer w0.254: v1(46.99,44.577) 48.006,44.577 52.07,40.513 P12.2
5V: C14.2 C17.2 C22.2 P3.3 P7.1 R12.2 U6.2 U7.3 U8.3 U9.1 U10.3 U13.1 | length 193
  Top Layer w0.254: v1(1.905,35.433) 1.905,29.112 1.905,11.303 7.747,5.461 v1(70.739,5.461) 74.168,8.89 74.168,17.763 74.168,20.955 U13.1 ; P7.1 8.988,35.433 11.532,37.977 v1(13.191,37.977) ; v1(23.55,47.498) C14.2 29.083,44.831 C17.2 33.337,44.831 ; P3.3 29.096,29.096 29.096,37.478 33.337,41.719 33.337,44.831 ; U9.1 35.245,44.638 R12.2 33.337,44.831
  Bottom Layer w0.254: v1(1.905,35.433) P7.1 ; v1(13.191,37.977) 12.315,37.977 11.049,39.243 11.049,44.577 12.069,45.597 ; U7.3 11.962,53.221 11.049,52.308 11.049,46.617 12.069,45.597 ; v1(23.55,47.498) 21.649,45.597 U8.3 12.069,45.597
12V: C12.1 C13.2 P6.1 P8.1 P9.1 U6.1 | length 37.5
  Top Layer w0.254: P6.1 11.43,47.781 ; C12.1 11.43,47.781 ; P9.1 P8.1 ; U6.1 C13.2 11.713,47.498 11.43,47.781
  Bottom Layer w0.254: P6.1 10.16,42.643 10.16,34.544 15.621,29.083 P9.1
12V_MTR: C10.1 C11.1 P8.2 P9.2 U4.9 U5.9 | length 58.4
  Top Layer w0.254: U4.9 3.175,15.367 6.604,18.796 C11.1 12.153,21.08 12.153,27.94 P9.2 15.328,27.051 19.685,27.051 ; P8.2 19.685,27.051 ; U5.9 24.511,15.494 27.813,18.796 ; C10.1 27.813,18.796 ; 19.685,27.051 19.685,20.955 21.844,18.796 27.813,18.796
BLU_KEY_HC05: P10.1 U11.34 | length 27.6
  Top Layer w0.254: v1(58.771,58.482) 69.788,58.482 72.005,56.265 72.005,49.153 P10.1
BLU_KEY_HC06: P10.3 U11.26 | length 44.4
  Bottom Layer w0.254: U11.26 62.789,46.482 68.834,52.527 68.834,57.709 70.46,59.334 74.092,59.334 74.905,58.522 74.905,41.173 P10.3
BLUE_KEY: C20.2 MCU1.32 P10.2 R16.1 S5.2 | length 68.9
  Top Layer w0.254: v1(44.958,54.991) 44.958,55.158 S5.2 45.413,57.899 56.909,57.899 57.175,57.633 65.405,57.633 69.102,57.633 71.425,55.31 71.425,47.193 P10.2 77.597,41.021 77.597,32.639 75.958,31 74.983,31 73.435,29.452 MCU1.32
  Bottom Layer w0.254: C20.2 v1(44.958,54.991)
BLUE_RX: MCU1.30 U11.2 | length 42.9
  Top Layer w0.254: MCU1.30 72.005,28.452 74.307,26.15 75.94,26.15 78.613,28.822 78.613,45.478 74.168,49.923 v1(74.168,56.896)
  Bottom Layer w0.254: U11.2 72.857,56.896 v1(74.168,56.896)
BLUE_TX: MCU1.31 U11.1 | length 40.1
  Top Layer w0.254: MCU1.31 73.41,28.952 73.787,28.575 76.073,28.575 78.105,30.607 78.105,45.339 72.771,50.673 v1(72.771,58.482)
BOOT0: P1.3 R3.2 | length 6.8
  Bottom Layer w0.254: P1.3 51.816,29.591 54.864,29.591 R3.2
BOOT1: MCU1.19 P1.4 P11.3 R4.2 U12.4 | length 83.8
  Top Layer w0.254: v1(53.16,43.942) 53.16,49.858 P11.3 64.77,51.689 66.834,49.625 U12.4 ; v1(64.262,19.304) 64.294,19.336 64.294,21.114 64.294,21.287 64.294,22.208 65.147,23.061 MCU1.19 65.147,25.384 v1(65.913,26.15)
  Bottom Layer w0.254: P1.4 51.701,24.626 55.106,24.626 R4.2 56.631,25.781 61.112,21.3 63.108,19.304 v1(64.262,19.304) ; v1(53.16,43.942) 59.891,37.211 67.564,37.211 69.85,34.925 69.85,27.559 68.441,26.15 v1(65.913,26.15)
BTN: C4.2 MCU1.18 R2.1 S2.1 | length 60.1
  Top Layer w0.254: v1(34.163,52.228) 34.163,52.037 S2.1 34.765,49.149 39.497,49.149 v1(41.91,46.736) ; v1(41.91,36.322) 41.91,27.813 45.72,24.003 60.198,24.003 61.849,25.654 64.389,25.654 64.647,25.396 MCU1.18
  Bottom Layer w0.254: v1(34.163,52.228) R2.1 ; v1(41.91,36.322) v1(41.91,46.736)
ENC_1A: P4.5 U2.1 | length 37.8
  Bottom Layer w0.254: P4.5 30.099,9.622 63.343,9.622 64.389,10.668 U2.1
ENC_1B: P4.6 U2.3 | length 41.6
  Bottom Layer w0.254: P4.6 33.909,6.828 65.248,6.828 67.026,8.606 67.026,12.703 66.521,13.208 U2.3
ENC_2A: P5.5 U2.5 | length 20.9
  Top Layer w0.254: P5.5 54.64,9.652 65.115,9.652 67.183,11.72 v1(67.183,14.478)
  Bottom Layer w0.254: U2.5 66.772,15.748 67.183,15.337 v1(67.183,14.478)
ENC_2B: P5.6 U2.9 | length 26.9
  Top Layer w0.254: P5.6 58.517,6.731 71.247,6.731 72.136,7.62 v1(72.136,17.018)
  Bottom Layer w0.254: U2.9 v1(72.136,17.018)
GND: C1.1 C2.1 C3.1 C4.1 C5.2 C6.2 C7.1 C8.1 C9.1 C10.2 C11.2 C12.2 C13.1 C14.1 C15.1 C16.1 C17.1 C18.1 C19.1 C20.1 C21.1 C22.1 D2.1 D3.1 MCU1.8 MCU1.23 MCU1.35 MCU1.47 P1.5 P1.6 P2.4 P6.2 P7.2 P11.1 Q1.2 R16.2 S1.2 S2.2 S3.1 S3.2 S3.3 S4.1 S4.2 S4.3 U1.2 U2.7 U3.10 U3.19 U4.10 U4.16 U5.10 U5.16 U6.3 U7.1 U8.1 U9.2 U10.1 U11.13 U11.21 U11.22 U12.6 U13.6 | length 456.4
  Top Layer w0.254: P6.2 6.604,39.145 6.604,33.245 P7.2 8.988,31.623 10.762,33.397 v1(13.191,33.397) ; C12.2 19.117,55.79 U6.3@21.186,53.721 ; v1(13.208,48.641) 14.351,49.784 C13.1 17.477,49.784 U6.3 ; v1(26.416,49.784) 25.123,49.784 U6.3 ; v1(28.956,38.862) 31.623,41.529 C17.1 ; v1(35.187,46.609) 39.751,46.609 40.894,45.466 40.894,43.688 ; S1.2 38.347,56.294 S2.2 23.759,56.294 U6.3@21.186,53.721 ; U9.2 40.894,43.688 ; v1(42.926,40.224) 42.897,40.195 Q1.2 41.331,41.473 40.894,41.91 40.894,43.688 ; C18.1 44.069,43.688 40.894,43.688 ; P1.6 P1.5 ; v1(49.022,55.025) 50.673,56.676 54.898,56.676 P11.1 68.199,56.769 70.834,54.134 70.834,48.038 ; v1(49.53,36.449) 50.28,36.449 56.63,30.099 ; v2(55.499,30.099) 56.63,30.099 ; MCU1.8 58.777,27.952 56.63,30.099 ; MCU1.47 62.662,32.904 62.662,32.06 63.226,31.496 v1(63.373,31.496) v1@63.373,31.593 ; v1(68.453,8.225) 68.453,14.732 67.183,16.002 v1(67.183,18.288) 67.532,18.637 67.532,22.519 67.147,22.904 MCU1.23 67.147,27.358 v1(67.31,27.521) 66.421,28.41 66.421,30.099 67.274,30.952 MCU1.35 70.68,30.952 70.97,31.242 v1(71.628,31.242) ; v1(70.206,48.666) 70.834,48.038 ; U12.6 70.834,48.038 ; U6.3@21.186,53.721 U6.3
  Bottom Layer w0.254: U4.10 7.62,14.605 14.859,14.605 ; U8.1 23.571,41.017 24.384,41.83 ; v1(13.208,48.641) 23.571,48.641 24.384,47.828 ; v1(24.384,50.931) 24.384,47.828 ; v1(26.416,49.784) 27.563,50.931 29.11,50.931 29.845,50.196 ; v1(28.956,38.862) 30.353,37.465 C1.1 30.48,35.941 U1.2 ; v1(35.187,46.609) 31.115,46.609 C9.1 29.845,50.196 ; v1(35.941,18.796) v1(14.769,18.796) 14.769,14.695 14.859,14.605 ; R16.2 C20.1 41.426,50.982 38.457,50.982 C3.1 35.914,50.931 33.174,50.931 C4.1 29.845,50.196 ; v1(42.926,40.224) 42.926,36.957 43.434,36.449 U3.10 v1(49.53,36.449) ; P1.6 49.276,27.051 62.141,27.051 v1(62.611,27.521) C6.2 v1(67.31,27.521) 68.961,29.172 68.961,30.353 67.818,31.496 v1(63.373,31.496) ; P1.5 48.023,28.321 49.75,30.048 55.448,30.048 v2(55.499,30.099) ; v1(49.022,47.913) 50.072,48.963 50.072,53.975 v1(49.022,55.025) ; U11.22 60.044,40.482 60.521,40.005 ; U11.21 60.521,40.005 ; v1(67.183,18.288) U2.7 62.738,18.288 62.141,17.691 62.141,14.135 S4.3 S4.2 S4.1 S3.3 S3.2 S3.1 U5.16 40.132,14.859 29.21,14.859 U5.10 24.892,14.859 23.114,14.859 U4.16 19.05,14.605 14.859,14.605 ; C22.1 68.453,6.843 ; v1(68.453,8.225) 68.453,6.843 ; v1(70.206,48.666) 68.275,48.666 67.081,47.473 67.081,41.453 68.052,40.482 ; v1(71.628,31.242) C2.1 75.462,27.408 P2.4 ; U11.13 68.052,40.482 ; U13.6 72.756,6.843 68.453,6.843 ; 24.384,41.83 C19.1 24.384,32.131 25.4,31.115 28.702,31.115 ; 24.384,41.83 C16.1 24.384,47.828 ; 28.702,31.115 30.074,31.115 30.48,31.521 U1.2 ; 28.702,31.115 U1.2 ; 60.521,40.005 62.103,40.005 v1(63.119,41.021) 63.658,40.482 68.052,40.482
  other v1: 9.869,16.383 31.078,16.637 72.644,24.46 9.271,28.067 37.084,28.321 17.78,32.258 66.929,35.052 72.629,35.052 57.785,36.634 17.78,38.481 27.94,53.213 47.117,53.848
LED: MCU1.29 R5.1 | length 9.8
  Top Layer w0.254: MCU1.29 69.143,27.922 70.199,27.922 70.993,27.128 R5.1
MTR1_A1: P4.3 U4.13 | length 10.4
  Top Layer w0.254: U4.13 13.335,11.303 14.529,10.109 19.198,10.109 P4.3
MTR1_A2: P4.4 U4.14 | length 11.7
  Top Layer w0.254: U4.14 15.875,11.303 16.612,10.566 22.551,10.566 P4.4
MTR1_B1: P4.2 U4.12 | length 9.1
  Top Layer w0.254: U4.12 10.795,11.303 12.446,9.652 15.845,9.652 P4.2
MTR1_B2: P4.1 U4.11 | length 7.9
  Top Layer w0.254: U4.11 8.255,11.303 11.333,8.225 P4.1
MTR1_DIR: U3.17 U4.1 | length 48.3
  Top Layer w0.254: U4.1 3.175,39.497 6.858,43.18 v1(28.702,43.18)
  Bottom Layer w0.254: v1(28.702,43.18) 29.591,44.069 U3.17
MTR1_ENB: U3.14 U4.8 | length 26.3
  Top Layer w0.254: U4.8 25.654,29.845 25.654,39.751 v1(26.162,40.259)
  Bottom Layer w0.254: v1(26.162,40.259) U3.14
MTR1_PWM: U3.18 U4.2 | length 46.8
  Top Layer w0.254: U4.2 5.715,40.386 7.493,42.164 v1(26.543,42.164)
  Bottom Layer w0.254: v1(26.543,42.164) 29.718,45.339 U3.18
MTR2_A1: P5.3 U5.13 | length 13.6
  Top Layer w0.254: U5.13 34.671,11.303 35.408,10.566 43.252,10.566 P5.3
MTR2_A2: P5.4 U5.14 | length 14.8
  Top Layer w0.254: U5.14 37.211,11.43 37.592,11.049 46.579,11.049 P5.4
MTR2_B1: P5.2 U5.12 | length 12.3
  Top Layer w0.254: U5.12 32.131,11.303 33.325,10.109 39.899,10.109 P5.2
MTR2_B2: P5.1 U5.11 | length 11.1
  Top Layer w0.254: U5.11 29.591,11.303 31.242,9.652 36.546,9.652 P5.1
MTR2_DIR: U3.15 U5.1 | length 24.9
  Top Layer w0.254: U5.1 26.162,26.797 26.162,39.116 v1(28.575,41.529)
  Bottom Layer w0.254: v1(28.575,41.529) U3.15@35.039,41.529 ; U3.15 U3.15@35.135,41.434 ; U3.15@35.039,41.529 U3.15@35.135,41.434 ; U3.15@35.039,41.529 U3.15@35.135,41.434
MTR2_ENB: U3.13 U5.8 | length 19.3
  Top Layer w0.254: v1(37.973,38.481) 37.973,36.957 39.484,35.446 39.484,27.953 U5.8
  Bottom Layer w0.254: U3.13 36.305,38.989 36.782,38.513 ; 36.782,38.513 37.973,38.513 36.782,38.513
MTR2_PWM: U3.16 U5.2 | length 24.2
  Top Layer w0.254: U5.2 27.051,29.21 26.67,29.591 26.67,38.174 29.898,41.402 v1(29.898,42.365)
  Bottom Layer w0.254: v1(29.898,42.365) 33.348,42.365 33.782,42.799 U3.16
NetC9_2: C9.2 P3.2 U3.1 U3.20 | length 33.7
  Top Layer w0.254: P3.2 34.404,31.864 34.404,34.544 37.084,37.224 v1(37.084,39.243)
  Bottom Layer w0.254: C9.2 U3.20 37.084,47.879 ; v1(37.084,39.243) 37.084,47.879 ; U3.1 37.084,47.879
NetC21_2: C21.2 P11.6 P12.1 U12.1 | length 15.9
  Top Layer w0.254: P12.1 56.769,39.751 56.769,44.069 ; P11.6 56.769,44.069 ; C21.2 C21.2 U12.1 60.707,44.069 56.769,44.069
NetD1_1: D1.1 R5.2 | length 2.9
  Top Layer w0.254: D1.1 68.707,16.671 R5.2
NetD2_2: D2.2 R14.2 | length 2.7
  Top Layer w0.254: D2.2 51.655,52.925 v1(51.689,52.959)
NetD3_2: D3.2 R15.2 | length 2.7
  Top Layer w0.254: D3.2 51.655,45.813 v1(51.689,45.847)
NetMCU1_3: MCU1.3 U3.3 | length 24.3
  Top Layer w0.254: v1(50.292,43.561) 50.292,39.739 59.579,30.452 MCU1.3
  Bottom Layer w0.254: U3.3 48.514,45.339 v1(50.292,43.561)
NetMCU1_4: MCU1.4 U3.6 | length 21.5
  Top Layer w0.254: v1(49.276,41.473) 49.835,40.914 49.835,39.55 59.433,29.952 MCU1.4
  Bottom Layer w0.254: U3.6 49.22,41.529 v1(49.276,41.473)
NetMCU1_5: MCU1.5 U3.5 | length 22.9
  Top Layer w0.254: v1(48.514,42.704) 48.514,40.224 49.602,39.137 59.286,29.452 MCU1.5
  Bottom Layer w0.254: U3.5 44.875,42.704 v1(48.514,42.704)
NetMCU1_6: MCU1.6 U3.7 | length 20.6
  Top Layer w0.254: v1(49.022,38.291) 49.801,38.291 51.458,36.634 59.14,28.952 MCU1.6
  Bottom Layer w0.254: U3.7 44.844,40.322 46.99,40.322 v1(49.022,38.291)
NetMCU1_10: MCU1.10 U3.2 | length 31.4
  Top Layer w0.254: v1(51.308,43.053) 51.308,39.37 58.674,32.004 61.472,32.004 61.747,31.728 61.747,27.176 61.524,26.952 MCU1.10
  Bottom Layer w0.254: U3.2 48.387,46.609 51.308,43.688 v1(51.308,43.053)
NetMCU1_11: MCU1.11 U3.4 | length 36.3
  Top Layer w0.254: v1(46.99,43.434) 46.99,31.496 46.228,30.734 46.228,25.781 47.549,24.46 54.432,24.46 56.424,26.452 MCU1.11
  Bottom Layer w0.254: U3.4 46.355,44.069 v1(46.99,43.434)
NetMCU1_14: MCU1.14 U11.11 | length 30.9
  Top Layer w0.254: v1(62.147,23.114) 62.647,23.614 MCU1.14
  Bottom Layer w0.254: v1(62.147,23.114) 68.326,23.114 70.739,25.527 70.739,37.011 73.863,40.135 73.863,42.39 U11.11
NetMCU1_15: MCU1.15 R13.1 | length 35.6
  Top Layer w0.254: v1(43.878,24.638) 46.164,22.352 62.461,22.352 63.147,23.038 MCU1.15 ; v1(43.878,27.495) 44.45,28.067 44.45,36.576 R13.1
  Bottom Layer w0.254: v1(43.878,24.638) v1(43.878,27.495)
NetMCU1_16: MCU1.16 U2.2 | length 15.2
  Top Layer w0.254: v1(63.627,11.938) 62.865,12.7 62.865,22.11 63.647,22.892 MCU1.16@63.647,24.232 ; MCU1.16@63.647,24.147 MCU1.16@63.647,24.232 ; MCU1.16 MCU1.16@63.647,24.232
  Bottom Layer w0.254: v1(63.627,11.938) U2.2
NetMCU1_17: MCU1.17 U2.4 | length 12.1
  Top Layer w0.254: v1(64.135,14.478) 64.008,14.478 63.343,15.143 63.343,21.941 64.147,22.745 MCU1.17
  Bottom Layer w0.254: v1(64.135,14.478) U2.4
NetMCU1_20: MCU1.20 R4.1 | length 12.4
  Top Layer w0.254: v1(65.278,21.336) 65.278,22.545 65.647,22.915 MCU1.20
  Bottom Layer w0.254: R4.1 58.547,24.892 60.793,22.646 62.103,21.336 v1(65.278,21.336)
NetMCU1_42: MCU1.42 U2.8 | length 45.4
  Top Layer w0.254: MCU1.42 65.147,36.338 66.655,37.846 v1(72.644,37.846)
  Bottom Layer w0.254: U2.8 72.644,18.288 74.676,16.256 76.962,16.256 78.486,17.78 78.486,35.378 78.486,35.675 76.315,37.846 v1(72.644,37.846)
NetMCU1_43: MCU1.43 U2.6 | length 56.5
  Top Layer w0.254: MCU1.43 64.647,36.485 66.77,38.608 v1(73.533,38.608)
  Bottom Layer w0.254: U2.6 67.708,17.018 68.453,16.273 68.453,14.925 69.528,13.85 69.548,13.83 77.203,13.83 77.343,13.97 78.994,15.621 78.994,35.814 77.343,37.465 76.314,38.494 73.647,38.494 v1(73.533,38.608)
NetMCU1_44: MCU1.44 R3.1 | length 9.8
  Top Layer w0.254: v1(63.754,28.702) 63.774,28.702 64.147,29.075 MCU1.44
  Bottom Layer w0.254: R3.1 59.055,28.702 v1(63.754,28.702)
NetMCU1_45: MCU1.45 U1.3 | length 33.6
  Top Layer w0.254: v1(63.627,35.052) 63.647,35.032 MCU1.45
  Bottom Layer w0.254: U1.3 35.179,35.052 v1(63.627,35.052)
NetMCU1_46: MCU1.46 U1.4 | length 55.7
  Top Layer w0.254: v1(62.611,34.29) 62.707,34.29 63.147,33.85 MCU1.46
  Bottom Layer w0.254: U1.4 36.97,34.303 ; v1(62.611,34.29) 62.84,34.29 v1@62.852,34.303 ; 36.97,34.303 v1@62.852,34.303 ; 36.97,34.303 v1@62.852,34.303
NetQ1_1: Q1.1 R13.2 | length 4.8
  Top Layer w0.254: Q1.1 43.878,38.291 R13.2
NetQ1_3: Q1.3 R12.1 U9.3 | length 8
  Top Layer w0.254: R12.1 35.245,42.738 U9.3 39.539,42.703 Q1.3
NetR6_1: R6.1 S3.4 U4.5 | length 43.4
  Bottom Layer w0.254: U4.5 13.335,23.495 15.081,21.749 38.813,21.749 38.822,21.757 39.44,21.757 39.449,21.749 40.053,21.749 40.062,21.757 40.68,21.757 ; 40.807,21.757 49.744,21.757 S3.4 R6.1
NetR7_1: R7.1 S3.5 U4.6 | length 40.1
  Top Layer w0.254: v1(15.836,20.955) 15.836,25.107 U4.6
  Bottom Layer w0.254: v1(15.836,20.955) 17.399,20.955 17.736,21.292 39.259,21.292 40.243,21.292 40.251,21.3 ; 40.378,21.3 47.661,21.3 S3.5 R7.1
NetR8_1: R8.1 S3.6 U4.7 | length 35.6
  Top Layer w0.254: v1(18.415,20.32) 18.415,24.638 U4.7@18.542,24.765 ; U4.7 U4.7@18.288,25.019 ; U4.7@18.288,25.019 U4.7@18.542,24.765 ; U4.7@18.288,25.019 U4.7@18.542,24.765
  Bottom Layer w0.254: v1@18.542,20.32 S3.6 R8.1
NetR9_1: R9.1 S4.4 U5.5 | length 30.7
  Bottom Layer w0.254: U5.5 36.081,23.736 57.29,23.736 S4.4 R9.1
NetR10_1: R10.1 S4.5 U5.6 | length 27.1
  Top Layer w0.254: v1(37.211,22.987) U5.6
  Bottom Layer w0.254: v1(37.211,22.987) 38.862,22.987 39.084,23.209 55.137,23.209 55.277,23.209 55.499,22.987 S4.5 R10.1
NetR11_1: R11.1 S4.6 U5.7 | length 22.1
  Top Layer w0.254: v1(39.751,22.479) U5.7
  Bottom Layer w0.254: v1(39.751,22.479) 53.467,22.479 S4.6 R11.1
NetR14_1: R14.1 U11.31 | length 13.5
  Bottom Layer w0.254: R14.1 R14.1@51.689,55.359 ; U11.31 57.394,55.359 ; R14.1@51.689,55.359 57.394,55.359 ; R14.1@51.689,55.359 57.394,55.359
NetR15_1: R15.1 U11.24 | length 9
  Bottom Layer w0.254: R15.1 54.483,45.339 56.914,45.339 U11.24
NRST: C3.2 MCU1.7 R1.1 S1.1 | length 41.3
  Top Layer w0.254: v1(39.497,52.197) 39.497,52.044 S1.1 38.392,50.901 40.017,49.276 45.72,49.276 47.752,47.244 47.752,38.528 48.942,37.338 50.038,37.338 58.924,28.452 MCU1.7
  Bottom Layer w0.254: v1(39.497,52.197) C3.2 R1.1
RF_CS: P11.2 U12.5 | length 22.8
  Top Layer w0.254: P11.2 66.929,54.229 68.834,52.324 U12.5
RF_RXD: MCU1.21 P11.5 U12.2 U13.2 | length 58.3
  Top Layer w0.254: P11.5 62.103,46.609 62.834,45.878 U12.2 67.025,40.005 73.169,40.005 74.517,38.656 74.517,36.374 v1(74.496,36.353) ; v1(66.147,22.225) MCU1.21
  Bottom Layer w0.254: v1(66.147,22.225) 73.66,22.225 U13.2 77.572,21.819 77.572,34.925 77.572,34.932 76.277,36.227 74.622,36.227 v1(74.496,36.353) v1@74.39,36.353
RF_TXD: MCU1.22 P11.4 U12.3 U13.3 | length 64.6
  Top Layer w0.254: P11.4 62.865,49.149 64.834,47.18 U12.3 68.263,40.767 73.053,40.767 75.311,38.509 v1(75.311,36.957) ; MCU1.22 66.647,22.758 66.877,22.527 66.877,21.411 v1(66.802,21.336)
  Bottom Layer w0.254: v1(66.802,21.336) 72.009,21.336 U13.3 78.029,19.736 78.029,35.371 76.442,36.957 v1(75.311,36.957) v1@75.311,37.211 ; v1@75.311,37.211 75.184,37.084 v1@75.311,37.211
SWCLK: MCU1.37 P2.3 | length 13.5
  Top Layer w0.254: MCU1.37 71.272,32.918 71.894,33.54 75.94,33.54 75.953,33.528 v1(76.708,33.528)
  Bottom Layer w0.254: P2.3 76.708,31.091 v1(76.708,33.528)
SWDIO: MCU1.34 P2.2 | length 7.1
  Top Layer w0.254: MCU1.34 73.529,30.452 P2.2
pads on no net: MCU1.1 MCU1.2 MCU1.12 MCU1.13 MCU1.25 MCU1.26 MCU1.27 MCU1.28 MCU1.33 MCU1.38 MCU1.39 MCU1.40 MCU1.41 U1.5 U1.6 U1.7 U1.8 U1.9 U1.10 U2.10 U2.11 U2.12 U2.13 U3.8 U3.9 U3.11 U3.12 U4.15 U5.15 U9.4 U11.3 U11.4 U11.5 U11.6 U11.7 U11.8 U11.9 U11.10 U11.14 U11.15 U11.16 U11.17 U11.18 U11.19 U11.20 U11.23 U11.25 U11.27 U11.28 U11.29 U11.30 U11.32 U11.33 U13.4 U13.5

## Polygon pours and split planes (outlines as drawn)
GND on Top Layer "GND_BOT" (solid, pour order 18): 0,60 80,60 80,0 0,0
no net on Top Layer "GND_BOT" (solid, pour order 16): 80,60.071
no net on Top Layer "GND_BOT" (solid, pour order 14): 0,60
GND on Bottom Layer "GND_BOT" (solid, pour order 12): 0,60 0,0 80,0 80,60

## Keep-outs
Keep-Out Layer:
  the board outline again, w0.254

## Text inside footprints (layer, text, board x,y; h text height)
D1: Top Overlay "+" at 72.273,16.337 h0.76 r90
D2: Top Overlay "+" at 48.722,51.425 h0.76
D3: Top Overlay "+" at 48.722,44.313 h0.76
L1: Top Overlay "payitforward" at 14.097,34.036 h1.78
S3: Top Overlay "2" at 48.271,13.71 h1.02; Top Overlay "1" at 45.871,13.71 h1.02; Top Overlay "ON" at 45.301,18.31 h1.02; Top Overlay "3" at 50.811,13.71 h1.02; Mechanical 13 "2" at 48.271,13.71 h1.02; Mechanical 13 "ON" at 45.301,18.31 h1.02; Mechanical 13 "1" at 45.871,13.71 h1.02; Mechanical 13 "3" at 50.811,13.71 h1.02
S4: Top Overlay "3" at 60.336,13.71 h1.02; Top Overlay "ON" at 54.826,18.31 h1.02; Top Overlay "1" at 55.396,13.71 h1.02; Top Overlay "2" at 57.796,13.71 h1.02; Mechanical 13 "3" at 60.336,13.71 h1.02; Mechanical 13 "1" at 55.396,13.71 h1.02; Mechanical 13 "ON" at 54.826,18.31 h1.02; Mechanical 13 "2" at 57.796,13.71 h1.02